# EAGLE board lokalizator (EAGLE 8.5.2)
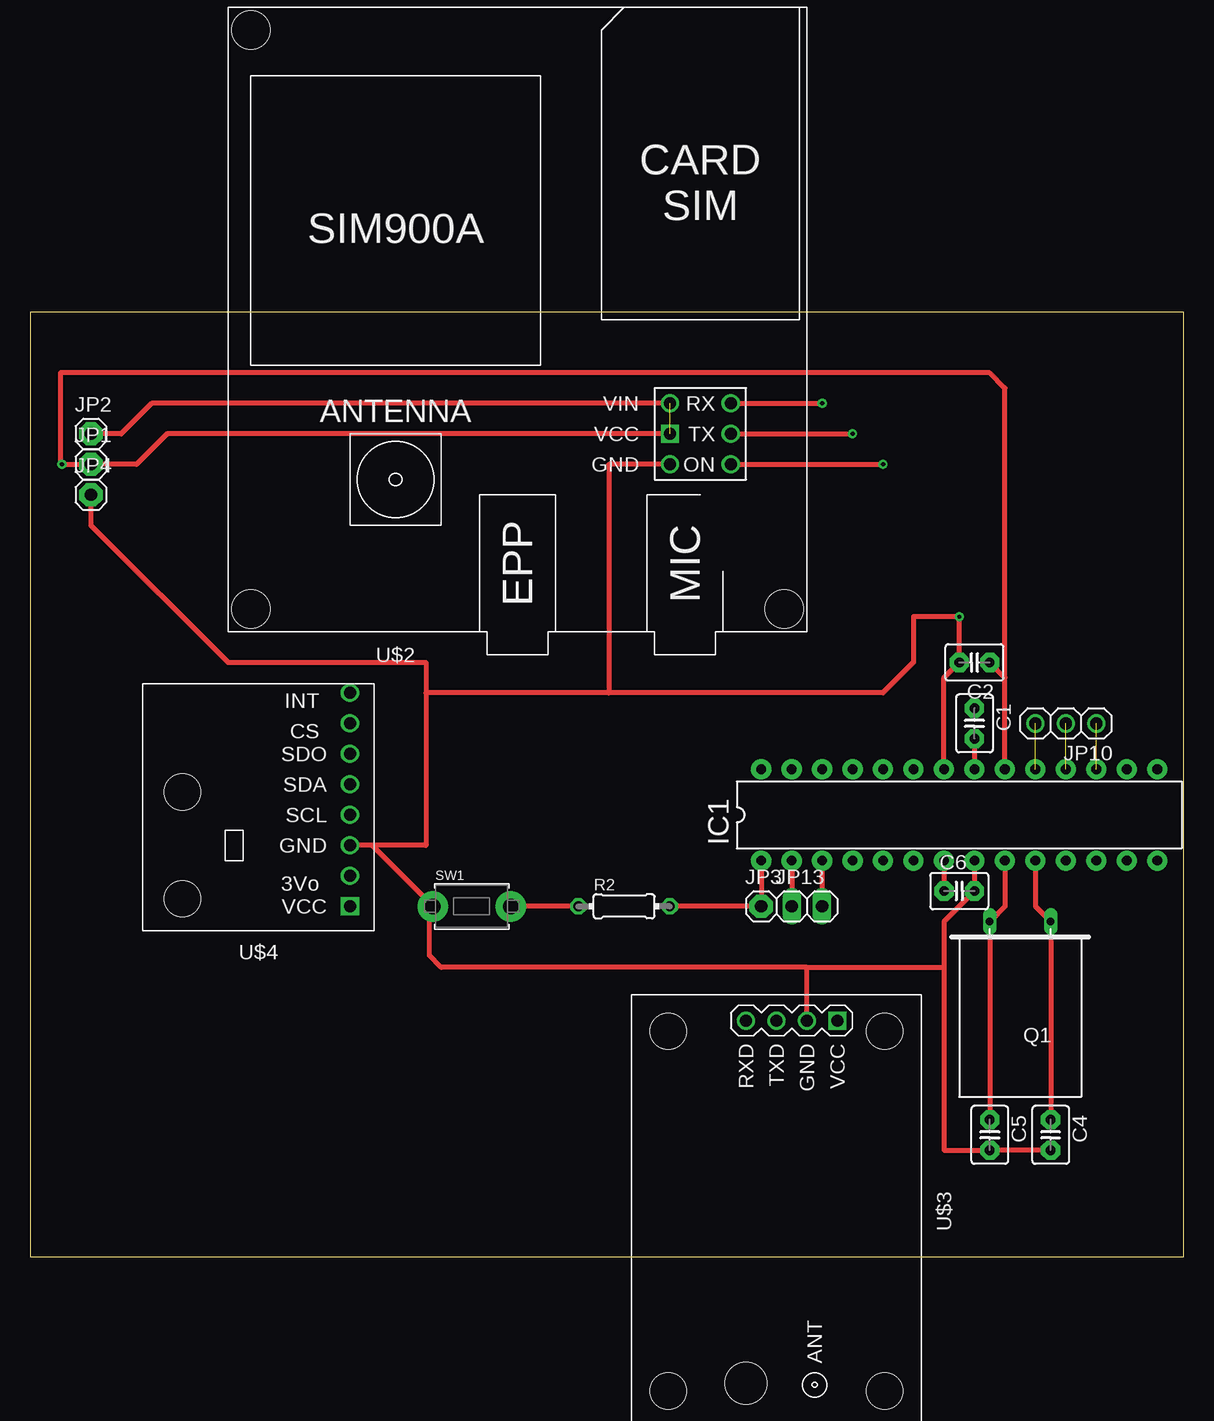
[diagram p0: board, top side]
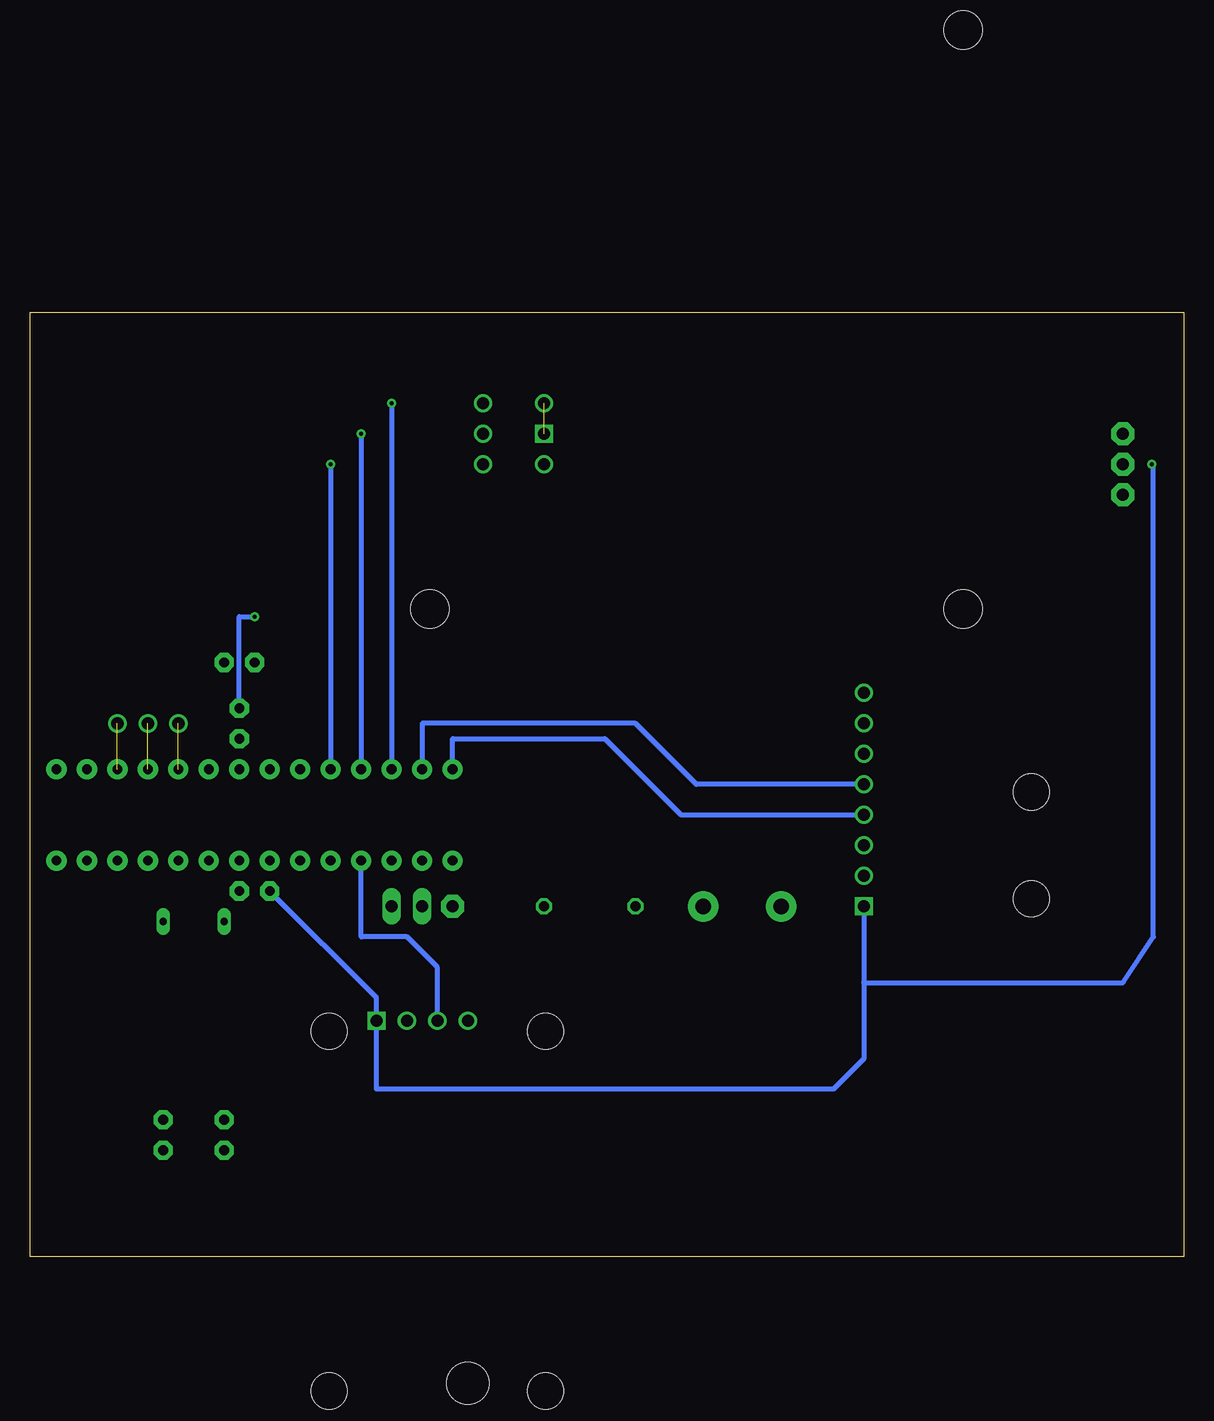
[diagram p1: board, bottom side, seen from below]

Size 96.19 x 78.73 mm. Coordinates in mm from the lower left corner, seen from the top.
Outline: 0,0 96.19,0 96.19,78.73 0,78.73 0,0
Copper layers (1*16): Top 0.035mm / dielectric 1.5mm / Bottom 0.035mm
Design rules "default": minimum track width 6mil, minimum drill 0.35mm, track to track 6mil, track to pad 6mil, pad to pad 6mil, via to via 6mil, smd to smd 6mil, copper to edge 40mil, drill to drill 6mil, minimum pad ring 10mil, minimum via ring 8mil, stop-mask expansion 4mil, vias tented up to drill 0mil, thermal gap 10mil

## Footprints (pad centres in the part's own frame; a part is rotated, then mirrored left to right if it is on the bottom)
C2.5-3 = drill 0.813 pad 1.6 octagon: 1 -1.27,0; 2 1.27,0
DIL28-3-ROUND = drill 0.813 pad 1.676: 1 -16.51,-3.81; 2 -13.97,-3.81; 3 -11.43,-3.81; 4 -8.89,-3.81; 5 -6.35,-3.81; 6 -3.81,-3.81; 7 -1.27,-3.81; 8 1.27,-3.81; 9 3.81,-3.81; 10 6.35,-3.81; 11 8.89,-3.81; 12 11.43,-3.81; 13 13.97,-3.81; 14 16.51,-3.81; 15 16.51,3.81; 16 13.97,3.81; 17 11.43,3.81; 18 8.89,3.81; 19 6.35,3.81; 20 3.81,3.81; 21 1.27,3.81; 22 -1.27,3.81; 23 -3.81,3.81; 24 -6.35,3.81; 25 -8.89,3.81; 26 -11.43,3.81; 27 -13.97,3.81; 28 -16.51,3.81
1X01 = drill 1.016 pad 1.93 octagon: 1 0,0
1X03 = drill 1.016: 1 -2.54,0; 2 0,0; 3 2.54,0
1X02 = drill 1.016 long: 1 -1.27,0; 2 1.27,0
Q = drill 0.61 long: 1 -2.54,-7.62; 2 2.54,-7.62
0204/7 = drill 0.813 octagon: 1 -3.81,0; 2 3.81,0
TACT_PANA-EVQ = drill 1.3 pad 2.54: P$1 -3.25,0; P$2 3.25,0
GSM-MODEM-SIM900A = drill 1: 1 -17.78,12.7; 2 -17.78,10.16; 3 -17.78,7.62; 4 -12.7,12.7; 6 -12.7,7.62 | drill 1 square: 5 -12.7,10.16 | hole 3.2: -22.225,24.765; 22.225,24.765; 22.225,-23.495
GPS-RECEIVER-NEO6M = drill 1 square: 1 -15.875,5.08 | drill 1: 2 -15.875,2.54; 3 -15.875,0; 4 -15.875,-2.54 | hole 3: -14.986,9.017; -14.986,-9.017; 14.986,-9.017; 14.986,9.017 | hole 3.5: 14.351,-2.54
LIGHT-SENSOR-BH1750 = drill 1 square: 1 -7.62,5.08 | drill 1: 2 -7.62,0; 3 -7.62,-7.62; 4 -7.62,-5.08; 5 -7.62,-2.54; 6 -7.62,2.54; 7 -7.62,-10.16; 8 -7.62,-12.7 | hole 3: 6.35,4.445; 6.35,-4.445

## Placement (x,y rotation side)
C1  100nF  [C2.5-3]  78.74,44.45 270 top
C2  100nF  [C2.5-3]  78.74,49.53 180 top
C4  22pF  [C2.5-3]  85.09,10.16 270 top
C5  22pF  [C2.5-3]  80.01,10.16 270 top
C6  100nF  [C2.5-3]  77.47,30.48 0 top
IC1  ATMEGA328PROUND  [DIL28-3-ROUND]  77.47,36.83 0 top
JP1  [1X01]  5.08,66.04 0 top
JP2  [1X01]  5.08,68.58 0 top
JP3  [1X01]  60.96,29.21 0 top
JP4  [1X01]  5.08,63.5 0 top
JP10  [1X03]  86.36,44.45 180 top
JP13  [1X02]  64.77,29.21 0 top
Q1  [Q]  82.55,20.32 180 top
R2  10k  [0204/7]  49.53,29.21 0 top
SW1  [TACT_PANA-EVQ]  36.83,29.21 0 top
U$2  GSM-MODULE-G510  [GSM-MODEM-SIM900A]  40.64,78.74 180 top
U$3  GPS-RECEIVER-NEO6M  [GPS-RECEIVER-NEO6M]  62.23,3.81 270 top
U$4  ACCELEROMETER SENSOR  [LIGHT-SENSOR-BH1750]  19.05,34.29 180 top

## Library data of the parts
C1 C2 C4-C6 = capacitor-wima
IC1 = atmega328
JP1-JP4 JP10 SW1 = adafruit
JP13 = pinhead
Q1 = special
R2 = eagle-ltspice; SPICEMODEL: NONE; SPICEPREFIX: R
U$2-U$4 = diy-modules2

## Nets
3VO: U$4.6
GND: C1.1 C2.2 C4.2 C5.2 C6.2 IC1.8 IC1.22 JP4.1 SW1.P$1 U$2.4 U$3.2 U$4.2
N$2: IC1.1 JP3.1 R2.2
N$3: C1.2 IC1.21
N$5: IC1.19 JP10.3
N$6: C5.1 IC1.9 Q1.2
N$8: IC1.18 JP10.2
N$9: IC1.17 JP10.1
N$11: C4.1 IC1.10 Q1.1
N$12: IC1.27 U$4.4
N$13: IC1.4 U$3.3
N$14: IC1.24 U$2.1
N$15: IC1.2 JP13.1
N$16: IC1.3 JP13.2
N$17: IC1.25 U$2.2
N$18: IC1.26 U$2.3
N$21: IC1.28 U$4.5
N$22: R2.1 SW1.P$2
RXD: U$3.4
VCC: C2.1 C6.1 IC1.7 IC1.20 JP1.1 JP2.1 U$2.5 U$2.6 U$3.1 U$4.1

## Tracks (layer width: path | path; a pad name or v marks a point on that pad's centre or on a via)
GND  (via drill 0.35)
  Top 0.406: C4.2 C5.2 76.2,8.89 76.2,24.13 | IC1.8 C6.2 76.2,27.94 76.2,24.13 | IC1.22 76.2,48.26 C2.2 v77.47,53.34 73.66,53.34 73.66,49.53 71.12,46.99 48.26,46.99 | SW1.P$1 33.3,29.49 | 33.3,29.49 28.5,34.29 | 28.5,34.29 U$4.2 | 48.26,46.99 33.02,46.99 | 33.02,46.99 33.02,34.29 28.5,34.29 | U$2.4 48.26,66.04 48.26,46.99 | U$3.2 64.77,24.13 | 64.77,24.13 76.2,24.13 | 64.77,24.13 34.29,24.13 33.3,25.12 33.3,29.49 | JP4.1 5.08,60.96 16.51,49.53 33.02,49.53 33.02,46.99
  Bottom 0.406: C1.1 78.74,53.34 v77.47,53.34
N$2
  Top 0.406: IC1.1 JP3.1 R2.2
N$3
  Top 0.406: C1.2 IC1.21
N$5  (1 unrouted)
N$6
  Top 0.406: IC1.9 81.28,29.21 Q1.2 C5.1
N$8  (1 unrouted)
N$9  (1 unrouted)
N$11
  Top 0.406: IC1.10 83.82,29.21 Q1.1 C4.1
N$12
  Bottom 0.406: IC1.27 63.5,44.45 45.72,44.45 40.64,39.37 U$4.4
N$13
  Bottom 0.406: U$3.3 62.23,24.13 64.77,26.67 68.58,26.67 IC1.4
N$14  (via drill 0.35)
  Top 0.406: U$2.1 v71.12,66.04
  Bottom 0.406: v71.12,66.04 IC1.24
N$15
  Top 0.406: IC1.2 JP13.1
N$16
  Top 0.406: IC1.3 JP13.2
N$17  (via drill 0.35)
  Top 0.406: U$2.2 v68.58,68.58
  Bottom 0.406: v68.58,68.58 IC1.25
N$18  (via drill 0.35)
  Top 0.406: U$2.3 v66.04,71.12
  Bottom 0.406: v66.04,71.12 IC1.26
N$21
  Bottom 0.406: IC1.28 60.96,43.18 48.26,43.18 41.91,36.83 U$4.5
N$22
  Top 0.406: R2.1 SW1.P$2
VCC  (via drill 0.35)  (1 unrouted)
  Top 0.406: IC1.7 C6.1 | IC1.20 81.28,48.26 | 81.28,48.26 C2.1 | 81.28,48.26 81.28,72.39 80.01,73.66 2.54,73.66 2.54,66.04 v2.66,66.04 JP1.1 8.89,66.04 11.43,68.58 U$2.5 | U$2.6 10.16,71.12 7.62,68.58 JP2.1
  Bottom 0.406: U$4.1 26.67,22.86 | 26.67,22.86 26.67,16.51 29.21,13.97 67.31,13.97 U$3.1 67.31,21.59 C6.1 | 26.67,22.86 5.08,22.86 2.54,26.67 2.54,66.04 v2.66,66.04